# Altium PCB PCB.PcbDoc
Units mm, origin at the board's own origin, x right, y up, seen from the top; angles counter-clockwise.
Board outline 7.24 x 6.48 mm, 2 copper layers (Top Layer, Bottom Layer); 8 components, 7 nets, 33 pads, 12 vias.
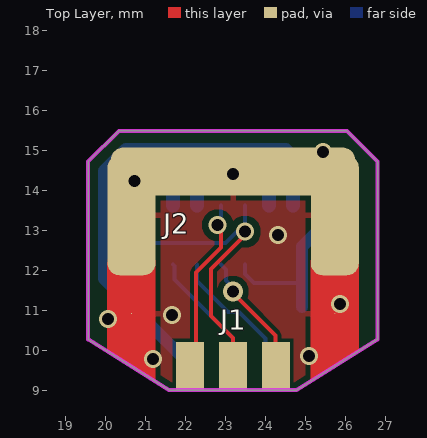
[diagram p0: Top Layer view]
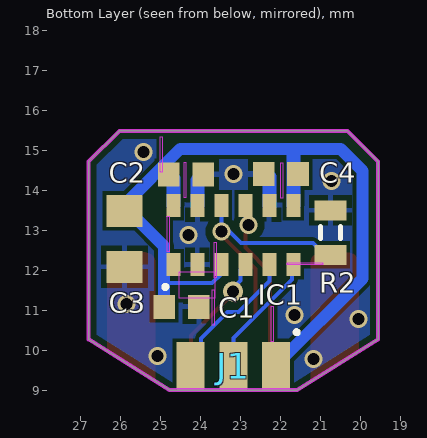
[diagram p1: Bottom Layer view, seen from below]
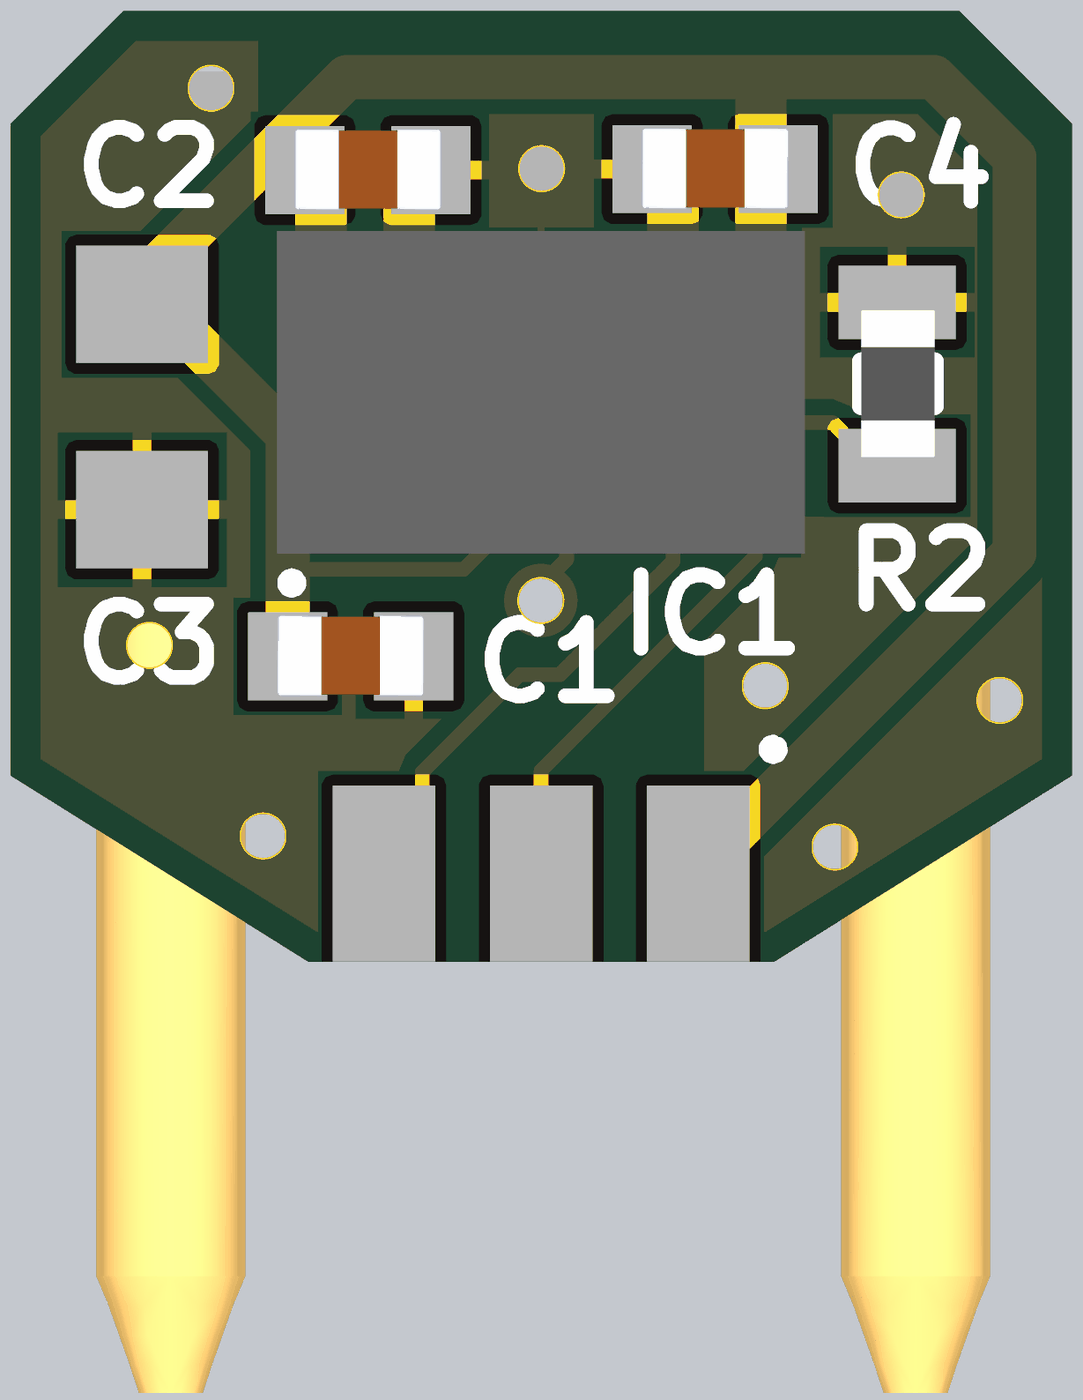
[diagram p2: 3D render of the assembled board from below, using the file's embedded part models]

## Layer stack, top to bottom
Top Solder: solder mask 0.0102, Solder Resist, Dk 3.5
Top Layer: signal copper 0.0356
Dielectric 1: dielectric 0.32, FR-4, Dk 4.8
Bottom Layer: signal copper 0.0356
Bottom Solder: solder mask 0.0102, Solder Resist, Dk 3.5

## Board outline
19.558,10.287 19.558,14.732 20.326,15.5 26.029,15.5 26.797,14.732 26.797,10.287 24.765,9.017 21.59,9.017

## Design rules (kind name [scope] priority, off if disabled: settings)
BoardOutlineClearance [All] p1: gap=0.2 ignorepadtopadclearanceinfootprint=FALSE
Clearance [All] p1: gap=0.1 ignorepadtopadclearanceinfootprint=FALSE except(0.127: Text-Text; 0.25: Arc-Hole Track-Hole SMDPad-Hole THPad-Hole Via-Hole Fill-Hole Poly-Hole Region-Hole Text-Hole)
ComponentClearance [All] p1: gap=0.127 collisioncheckmode=3 verticalgap=0.127 showdistances=TRUE
DiffPairsRouting [All] p1: maxlimit=0.254 minlimit=0.127 mostfreqgap=0.127 toplayer_minwidth=0.127 toplayer_maxwidth=25.4 toplayer_prefwidth=0.127 bottomlayer_minwidth=0.127 bottomlayer_maxwidth=25.4 bottomlayer_prefwidth=0.127 maxuncoupledlength=12.7
Height [All] p1: minheight=0 maxheight=1816.048 prefheight=12.7
HoleSize [All] p1: absolutevalues=TRUE maxlimit=6.3 minlimit=0.3 maxpercent=80.000 minpercent=20.000
HoleToHoleClearance [All] p1: gap=0.25 allowstackedmicrovias=FALSE
MinimumAnnularRing [All] p1: minimumring=0.074
MinimumSolderMaskSliver [All] p1: minsoldermaskwidth=0
PlaneClearance [All] p1: clearance=0.127
PlaneConnect PlaneConnectPowerPads [InPadClass('PowerPads')] p1: planeconnectstyle=Direct reliefexpansion=0.508 reliefentries=4 reliefconductorwidth=0.254 reliefairgap=0.254
PlaneConnect [All] p2: pad.planeconnectstyle=Relief pad.reliefexpansion=0.3 pad.reliefentries=4 pad.reliefconductorwidth=0.127 pad.reliefairgap=0.127 via.planeconnectstyle=Direct via.reliefexpansion=0.3 via.reliefentries=4 via.reliefconductorwidth=0.127 via.reliefairgap=0.127
PolygonConnect PolygonConnectPowerPads [All vs (InPadClass('PowerPads'))] p1: connectstyle=Direct reliefconductorwidth=0.254 reliefentries=4 polygonreliefangle="90 Angle" airgapwidth=0.254
PolygonConnect [All] p2: thpad.connectstyle=Relief thpad.reliefconductorwidth=0.127 thpad.reliefentries=4 thpad.polygonreliefangle="90 Angle" thpad.airgapwidth=0.127 smdpad.connectstyle=Relief smdpad.reliefconductorwidth=0.127 smdpad.reliefentries=4 smdpad.polygonreliefangle="90 Angle" smdpad.airgapwidth=0.127 via.connectstyle=Direct via.reliefconductorwidth=0.127 via.reliefentries=4 via.polygonreliefangle="90 Angle" via.airgapwidth=0.127
RoutingVias [All] p1: holewidth=0.4 width=0.6 viastyle="Through Hole" minholewidth=0.3 minwidth=0.45 maxholewidth=0.5 maxwidth=0.7
SilkToSilkClearance [All] p1: silktosilkclearance=0
SilkToSolderMaskClearance [IsPad] p1: minsilkscreentomaskgap=0.127 clearancetoexposedcopper=TRUE
SolderMaskExpansion [All] p1: expansion=0.075 istentingtop=FALSE
SupplyNets "Schematic Supply Nets_1" [InNet('GND')] p1: voltage=0.000
SupplyNets "Schematic Supply Nets" [InNet('+3V3')] p2: voltage=0.000
Width [All] p1: maxlimit=25.4 minlimit=0.1 preferedwidth=0.127 minimp=50.000000 maximp=50.000000 favimp=50.000000
20 further rules are at their usual default settings.

## Components (designator, comment, footprint, x,y, rotation, side; value= is the part's Value field where it differs from the comment)
C1 "Cap0402" CAP0402 24.478,11.1 r0 bottom value=100nF
C2 "Cap0402" CAP0402 24.36,14.415 r0 bottom value=100nF
C3 "Cap0603" CAP0603 25.9,12.8 r90 bottom value=1uF
C4 "Cap0402" CAP0402 21.991,14.422 r0 bottom value=100nF
IC1 "TMF8806" TMF88051B 23.179,12.9 r180 bottom locked
J1 "TOF_conn" PCBCOMPONENT_1 24.582,9.038 r180 bottom locked
J2 "FC_Mount" FC_MOUNT 20.414,7.881 r0 top locked
R2 "Res0402" RES0402 20.745,12.959 r270 bottom value=10k

## Footprints (in the part's own frame and the unit in brackets; to place one, negate y for a bottom-side part, rotate by r counter-clockwise, add the part's x,y. Pads: shape width x height; smd on the part's side, far side on the other; paste and mask are expansions set on the pad)
CAP0402 [mm]
  rect 0.54x0.6 smd: 1(-0.43,0) 2(0.43,0)
  body extent -0.5,-0.28 0.5,0.27, height 0.5
CAP0603 [mm]
  rect 0.8x0.9 smd: 1(-0.7,0) 2(0.7,0)
  body extent -0.87,-0.48 0.87,0.48, height 0.55
FC_MOUNT [mil]
  round 1 smd: 1(8.97,120) 1(209.13,120)
  rrect50% 47.24x118.11 smd: 1(8.97,216.81) 1(209.13,216.81)
  rrect50% 240x47.24 smd: 1(108.98,260.12)
  Top Layer region: 32.59,54.1 -14.64,83.4 -14.64,170.77 -13.27,174.75 -10.48,177.9 -6.69,179.75 -2.49,180 -2.49,180 18.97,180 23.27,180.33 27.37,178.98 30.64,176.17 32.59,172.32 32.59,172.32
  Top Layer region: 185.51,54.1 232.74,83.4 232.74,170.77 231.37,174.75 228.58,177.9 224.79,179.75 220.59,180 220.59,180 199.13,180 194.83,180.33 190.73,178.98 187.46,176.17 185.51,172.32 185.51,172.32
  body extent -12,-71 228,283, height 42
PCBCOMPONENT_1 [mm]
  rect 0.7x1.2 smd: 1(2.475,0.581) 2(1.403,0.581) 3(0.332,0.581)
  rect 0.7x1.2 smd far side: 4(0.332,0.581) 5(1.403,0.581) 6(2.475,0.581)
  silkscreen extent 2.94,1.38 3.04,1.48
RES0402 [mm]
  rect 0.5x0.8 smd: 1(-0.555,-0.005) 2(0.559,-0.005)
  silkscreen extent -0.15,-0.25 0.15,0.25, body extent -0.5,-0.25 0.5,0.25, height 0.4
TMF88051B [mm]
  rect 0.35x0.575 smd: 1(-1.5,-0.738) 2(-0.9,-0.738) 3(-0.3,-0.738) 4(0.3,-0.738) 5(0.9,-0.738) 6(1.5,-0.738) 7(1.5,0.738) 8(0.9,0.738) 9(0.3,0.738) 10(-0.3,0.738) 11(-0.9,0.738) 12(-1.5,0.738)
  silkscreen extent -1.75,-1.35 -1.65,-1.25, body extent -1.8,-1.1 1.8,1.1, height 1.2

## Part data
C1 C2 C4: Voltage=6V3
C3: Voltage=25V
IC1: library part TMF8805-1B, "Integrated Circuit", Manufacturer_Name="ams OSRAM", Mouser Part Number=985-TMF8805-1B, Datasheet Link=https://ams.com/documents/20143/4372629/TMF8805_DS000692_4-00.pdf, HEIGHT=1.1mm, Manufacturer_Part_Number=TMF8805-1B, Mouser Price/Stock=https://www.mouser.co.uk/ProductDetail/ams-OSRAM/TMF8805-1B?qs=sPbYRqrBIVlwsjHE%2F%252BrL9g%3D%3D

## Via types
v1: diameter 0.45, hole 0.3, Top Layer to Bottom Layer, tented both sides, 11 vias
v2: diameter 0.5, hole 0.3, Top Layer to Bottom Layer, tented both sides, 1 vias

## Nets (pads, with @x,y where several pads share a name; then routed paths per layer and width w, separated by ;. In a path a pad name is that pad's centre, name@x,y a point inside that pad or via, vN(x,y) a via of type N, cw(c..) or ccw(c..) an arc to the next point about the centre after c; other vN are vias at no path point)
+3V3: C1.2 C2.2 C3.2 C4.1 IC1.1 IC1.3 IC1.7 IC1.12 J1.1 | length 19.4
  Bottom Layer w0.1: IC1.3 23.479,11.921 23.707,11.694 24.908,11.694
  Bottom Layer w0.3: J1.1@22.107,9.649 19.95,11.806 19.95,14.5 20.5,15.05 24.503,15.05 25.9,13.653 C3.2 25.799,13.5 24.908,12.609 24.908,11.694 C1.2
  Bottom Layer w0.35: IC1.7 21.679,14.883 ; IC1.12 24.679,14.305 C2.2
EN: IC1.9 J1.6 | length 4.5
  Top Layer w0.1: J1.6 22.26,9.772 22.26,11.96 22.879,12.579 22.879,13.063 v1(22.799,13.144)
  Bottom Layer w0.1: v1(22.799,13.144) 22.877,13.144 22.879,13.146 IC1.9
GND: C1.1 C2.1 C3.1 C4.2 IC1.2 IC1.8 IC1.11 J2.1 R2.1 | length 1.7
  Bottom Layer w0.35: IC1.8 22.279,14.344 C4.2@22.421,14.486 ; C2.1 24.079,14.266 IC1.11
  other v1: 21.175,9.8 25.075,9.875 20.05,10.8 21.65,10.9 25.85,11.175 24.3,12.9 20.722,14.246 23.175,14.425 25.43,14.973
GPIO: IC1.10 J1.5 R2.2 | length 7.6
  Top Layer w0.1: J1.5 23.179,10.321 22.628,10.872 22.628,12.043 23.48,12.895 v1(23.48,12.983)
  Bottom Layer w0.1: R2.2 20.885,12.535 21.033,12.535 21.191,12.694 22.988,12.694 23.277,12.983 v1(23.48,12.983) ; v1@23.479,12.984 IC1.10
INT: IC1.4 J1.4 | length 3.1
  Top Layer w0.1: v2(23.181,11.481) 23.163,11.463 24.24,10.385 24.24,9.629 J1.4
  Bottom Layer w0.1: IC1.4 23.004,12.037 23.004,11.761 23.163,11.602 23.163,11.481 v2(23.181,11.481)
SCL: IC1.5 J1.3 | length 3.5
  Bottom Layer w0.1: IC1.5 22.279,11.746 23.05,10.975 23.325,10.975 23.99,10.31 23.99,9.88 J1.3
SDA: IC1.6 J1.2 | length 3.2
  Bottom Layer w0.1: IC1.6 21.717,12.125 21.717,11.783 23.179,10.321 J1.2

## Polygon pours and split planes (outlines as drawn)
GND on Top Layer "GND_L01_P002" (solid, pour order 2): 19.558,10.287 19.558,14.732 20.193,15.367 26.162,15.367 26.797,14.732 26.797,10.287 24.765,9.017 21.59,9.017
GND on Bottom Layer "C" (solid, pour order 3): 19.558,10.287 19.558,14.732 20.193,15.367 26.162,15.367 26.797,14.732 26.797,10.287 24.765,9.017 21.59,9.017

## Keep-outs
Bottom Layer:
  rectangle: 24.95,14.462 24.999,15.35
  region: 20.939,12.209 20.939,12.16 21.828,12.16 21.828,12.209
  region: 22.225,11.113 22.176,11.113 22.176,10.225 22.225,10.225
  region: 21.995,14.704 21.945,14.704 21.945,13.815 21.995,13.815
  region: 24.411,14.716 24.362,14.716 24.362,13.828 24.411,13.828
  region: 24.833,13.365 24.784,13.365 24.784,12.476 24.833,12.476
  region: 24.531,11.313 24.531,11.983 23.643,11.983 23.643,11.313
  rectangle: 23.606,11.828 23.655,12.717
  rectangle: 23.657,10.643 23.707,11.531
Keep-Out Layer:
  the board outline again, w0.1